# EAGLE board Control de Motores con Botones (EAGLE 9.7.0)

Size 111.18 x 137.75 mm. Coordinates in mm from the lower left corner, seen from the top.
Outline: 0,0 111.18,0 111.18,137.75 0,137.75 0,0
Copper layers (1*16): Top 0.035mm / dielectric 1.5mm / Bottom 0.035mm
Design rules "default": minimum track width 6mil, minimum drill 0.35mm, track to track 6mil, track to pad 6mil, pad to pad 6mil, via to via 6mil, smd to smd 6mil, copper to edge 40mil, drill to drill 6mil, minimum pad ring 10mil, minimum via ring 8mil, stop-mask expansion 4mil, vias tented up to drill 0mil, thermal gap 10mil

## Footprints (pad centres in the part's own frame; a part is rotated, then mirrored left to right if it is on the bottom)
DG01D = drill 1.118 pad 3.15 octagon: + 2.54,0; - -2.54,0
RESAD1016W63L850D250B = drill 0.83 pad 1.43: 1 -5.08,0; 2 5.08,0
SWITCH-MOMENTARY-PTH-6.5MM = drill 1.016 pad 1.88: 1 -3.251,2.261; 2 3.251,2.261; 3 -3.251,-2.261; 4 3.251,-2.261
ARDUINO-UNO-R3-SHIELD = drill 1.016 pad 1.88: 3.3V 24.13,-2.54; 5V 24.13,0; A0 24.13,12.7; A1 24.13,15.24; A2 24.13,17.78; A3 24.13,20.32; A4 24.13,22.86; A5 24.13,25.4; AREF -24.13,-13.97; D2 -24.13,20.32; D3 -24.13,17.78; D4 -24.13,15.24; D5 -24.13,12.7; D6 -24.13,10.16; D7 -24.13,7.62; D8 -24.13,3.81; D9 -24.13,1.27; D10 -24.13,-1.27; D11 -24.13,-3.81; D12 -24.13,-6.35; D13 -24.13,-8.89; GND@0 24.13,2.54; GND@1 24.13,5.08; GND@2 -24.13,-11.43; IOREF 24.13,-7.62; NC 24.13,-10.16; RES 24.13,-5.08; RX -24.13,25.4; SCL -24.13,-19.05; SDA -24.13,-16.51; TX -24.13,22.86; VIN 24.13,7.62

## Placement (x,y rotation side)
M1  MOTOR_DG01D  [DG01D]  35.57,125.05 90 top
M2  MOTOR_DG01D  [DG01D]  35.5,12.7 90 top
R1  1k  [RESAD1016W63L850D250B]  86.68,54.14 90 top
R2  1k  [RESAD1016W63L850D250B]  93.31,62.99 90 top
R3  1k  [RESAD1016W63L850D250B]  100.39,54.14 90 top
SADELANTE  SWITCH_MOMENTARY  [SWITCH-MOMENTARY-PTH-6.5MM]  95.85,71.88 90 top
SDERECHA  SWITCH_MOMENTARY  [SWITCH-MOMENTARY-PTH-6.5MM]  102.93,63.03 90 top
SIZQUIERDA  SWITCH_MOMENTARY  [SWITCH-MOMENTARY-PTH-6.5MM]  89.22,63.03 90 top
U1  ARDUINO-UNO-R3-SHIELD  [ARDUINO-UNO-R3-SHIELD]  47.88,60.63 270 top

## Library data of the parts
M1 M2 R1-R3 SADELANTE SDERECHA SIZQUIERDA U1 = Tinkercad

## Nets
U1_5V: SADELANTE.3 SDERECHA.3 SIZQUIERDA.3 U1.5V
U1_D2: R2.2 SADELANTE.1 SADELANTE.2 U1.D2
U1_D3: R3.2 SDERECHA.1 SDERECHA.2 U1.D3
U1_D12: M1.+ U1.D12
U1_D13: M2.+ U1.D13
U1_GND: M1.- M2.- R1.1 R2.1 R3.1 U1.GND@0 U1.GND@1 U1.GND@2
U1_TX: R1.2 SIZQUIERDA.1 SIZQUIERDA.2 U1.TX

## Tracks (layer width: path | path; a pad name or v marks a point on that pad's centre or on a via)
U1_5V  (3 unrouted)
U1_D2  (3 unrouted)
U1_D3  (3 unrouted)
U1_D12  (1 unrouted)
U1_D13  (1 unrouted)
U1_GND  (7 unrouted)
U1_TX  (3 unrouted)